# Altium PCB status board.PcbDoc
Units mil, origin at the board's own origin, x right, y up, seen from the top; angles counter-clockwise.
Board outline 2250 x 2500 mil, 2 copper layers (Top Layer, Bottom Layer); 43 components, 26 nets, 159 pads, 36 vias.
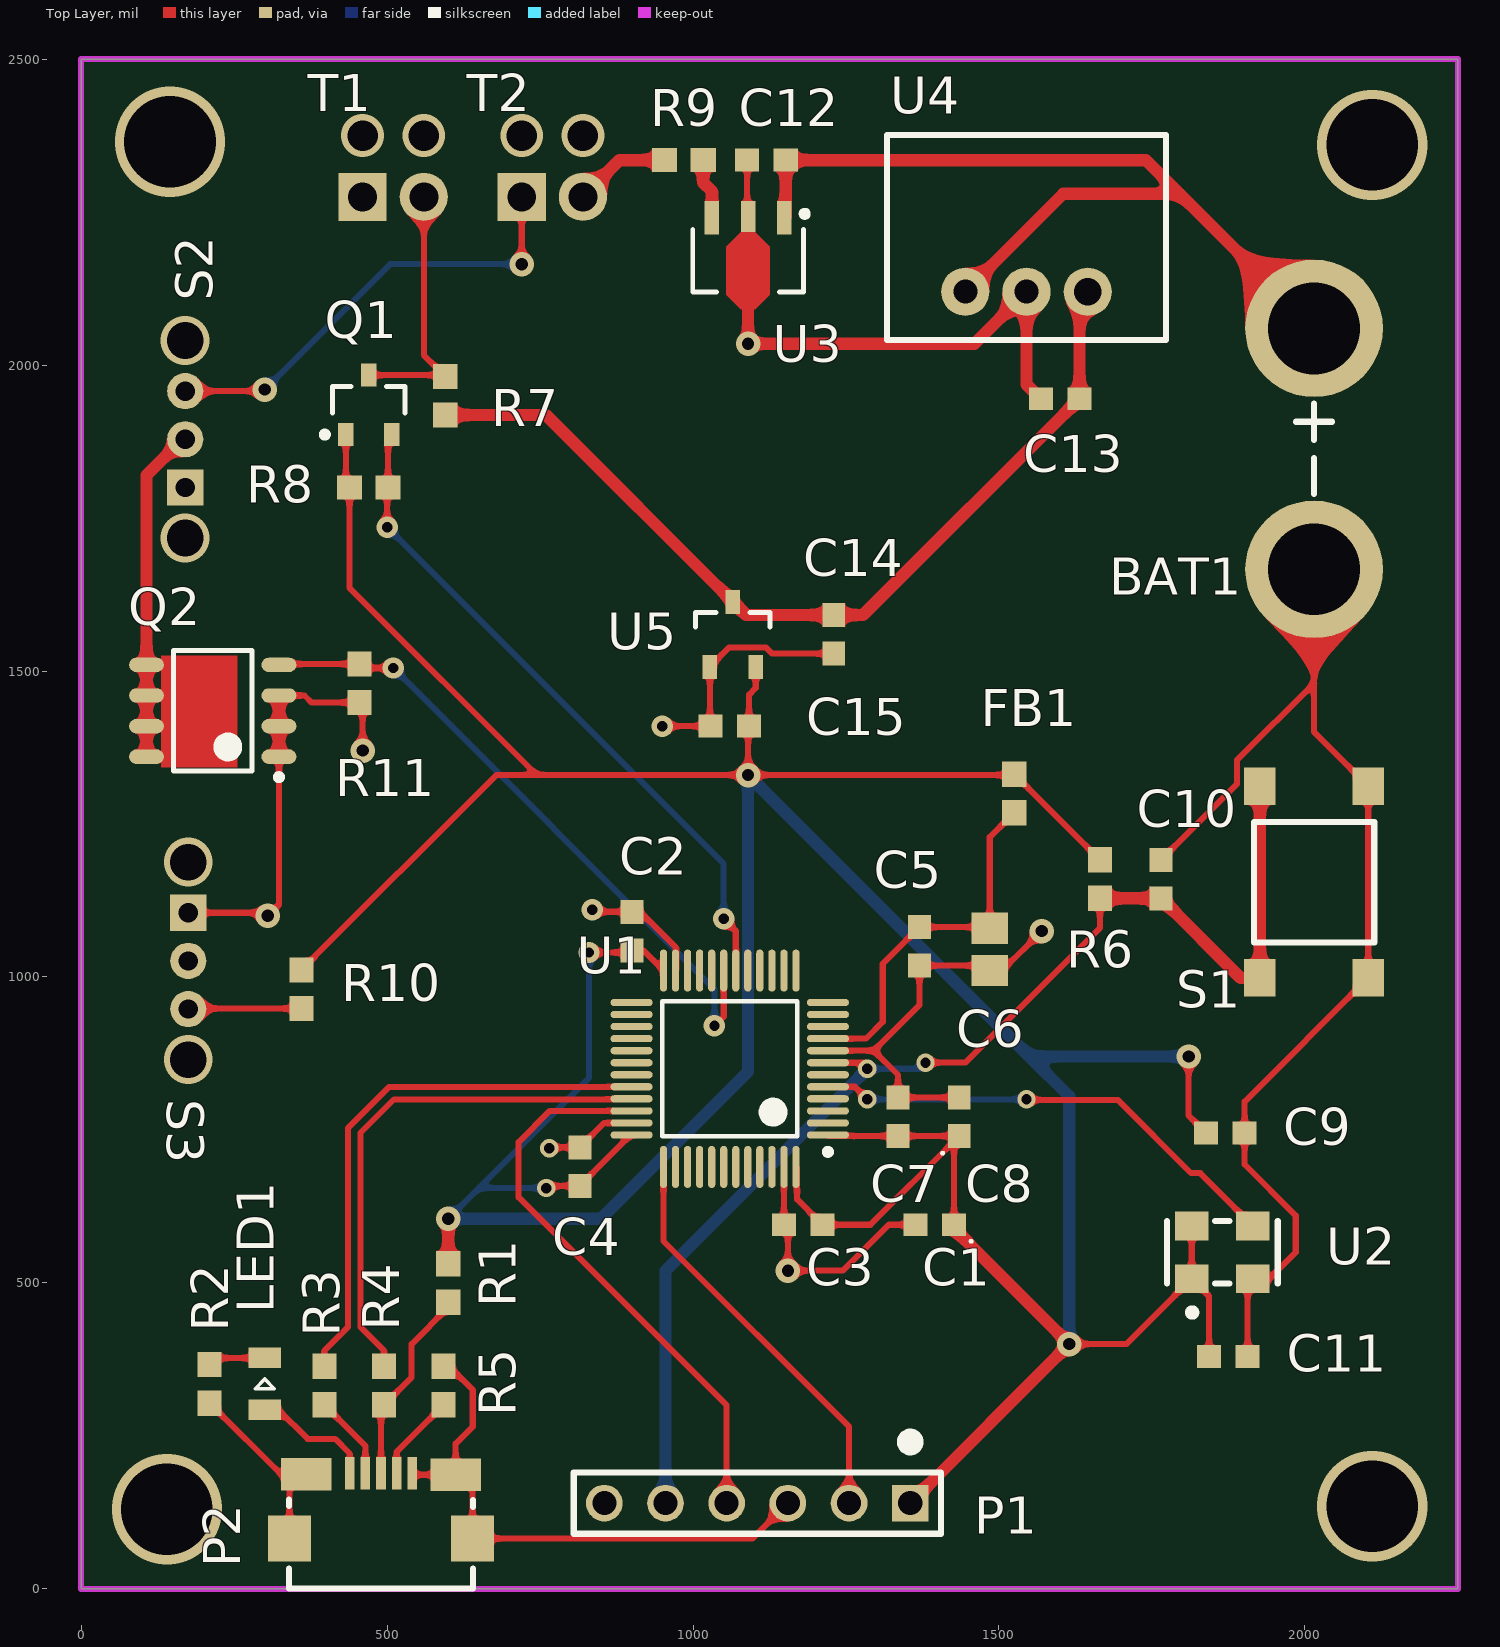
[diagram p0: Top Layer view]
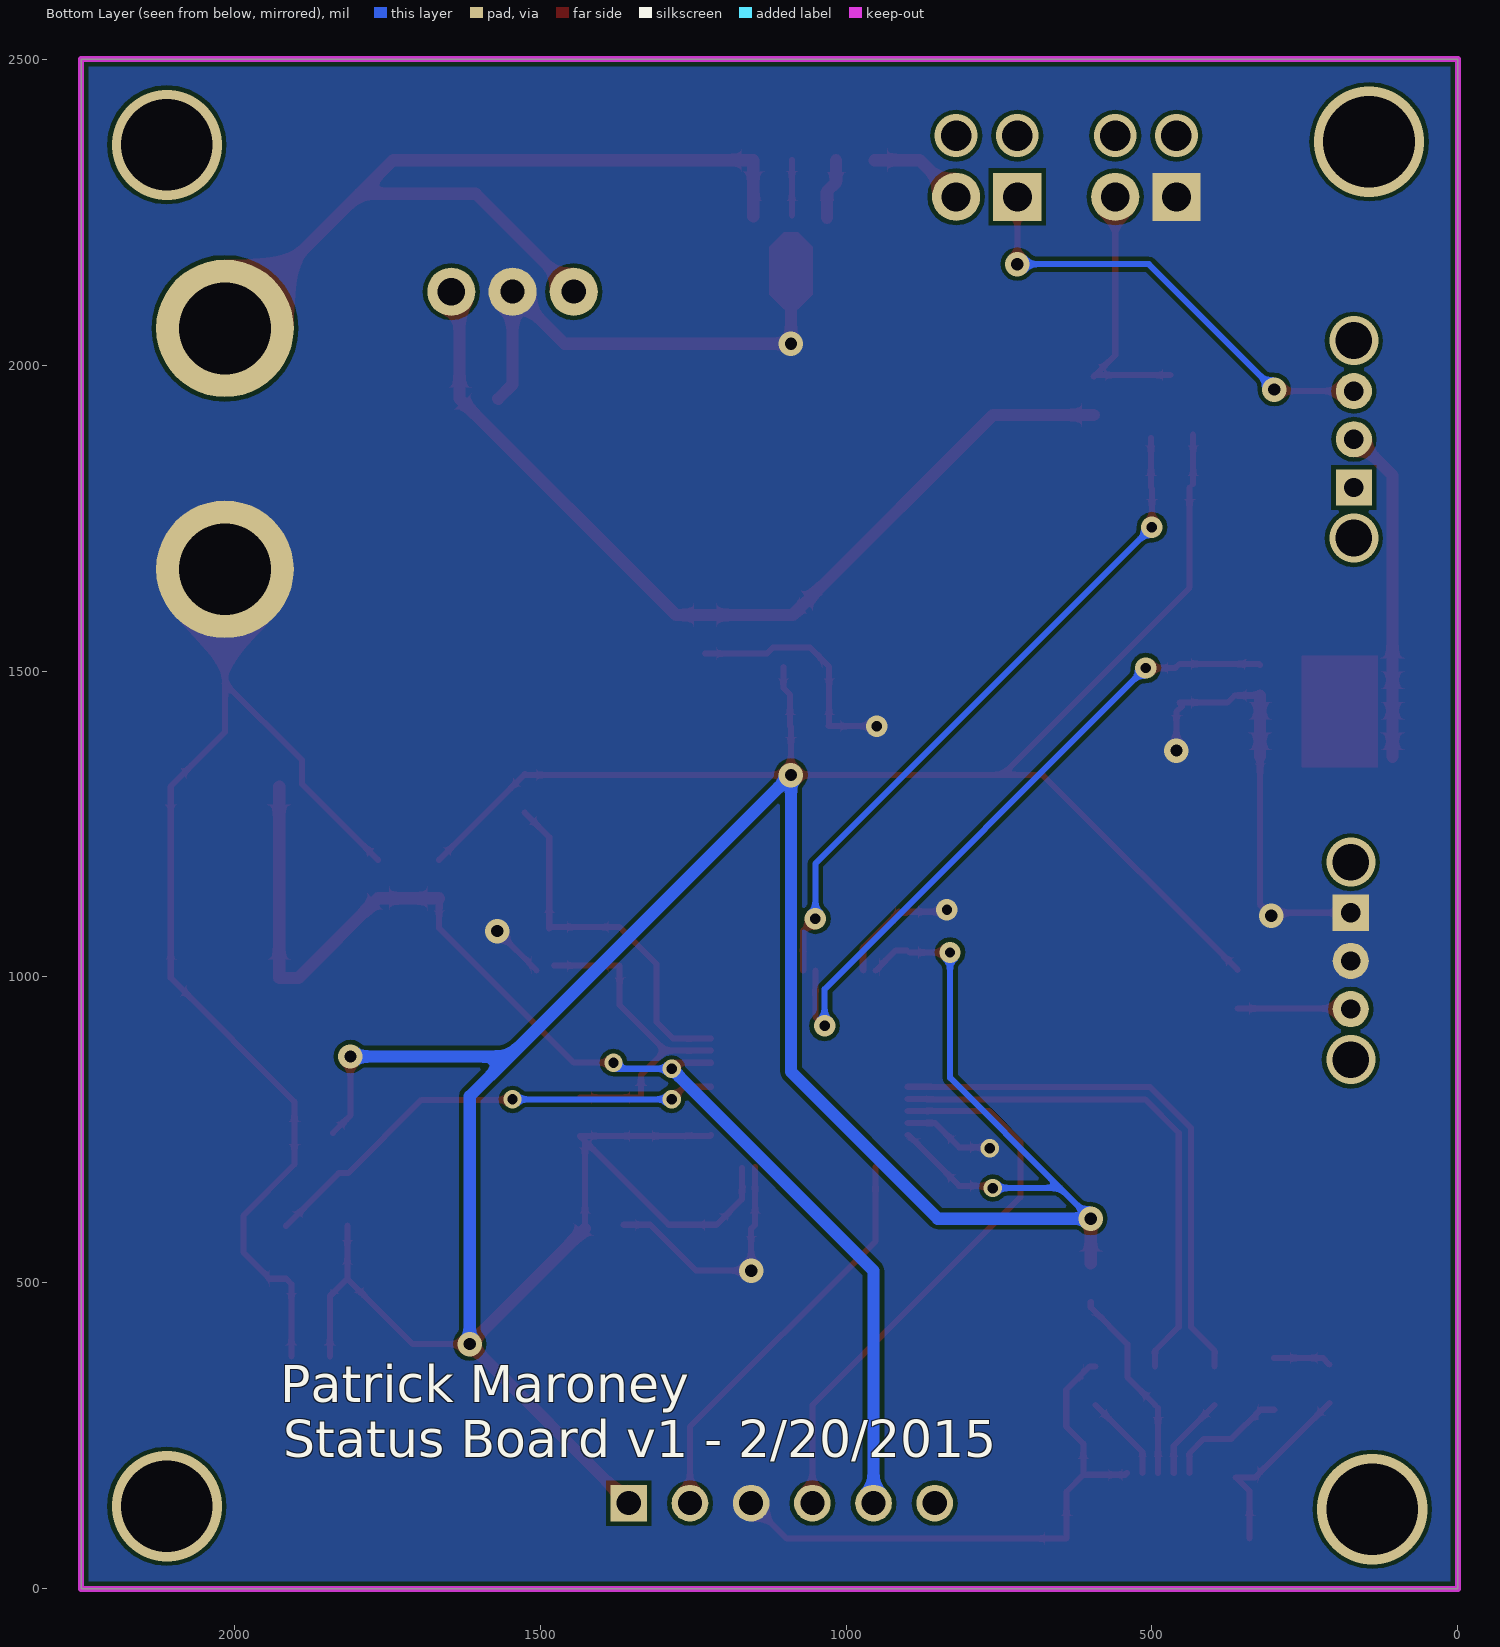
[diagram p1: Bottom Layer view, seen from below]

## Layer stack, top to bottom
Top Solder: solder mask 0.4, Solder Resist, Dk 3.5
Top Layer: signal copper 1.4
Dielectric1: dielectric 12.6, FR-4, Dk 4.8
Bottom Layer: signal copper 1.4
Bottom Solder: solder mask 0.4, Solder Resist, Dk 3.5

## Board outline
0,0 2250,0 2250,2500 0,2500

## Design rules (kind name [scope] priority, off if disabled: settings)
Clearance [All] p1: gap=7
DiffPairsRouting [All] p1: maxlimit=10 minlimit=7 mostfreqgap=10 toplayer_minwidth=7 toplayer_maxwidth=15 toplayer_prefwidth=10 bottomlayer_minwidth=7 bottomlayer_maxwidth=15 bottomlayer_prefwidth=10 maxuncoupledlength=500
PlaneConnect [All] p1: planeconnectstyle=Direct reliefexpansion=20 reliefentries=4 reliefconductorwidth=10 reliefairgap=10
PolygonConnect [All] p1: connectstyle=Direct reliefconductorwidth=10 reliefentries=4 polygonreliefangle="90 Angle" airgapwidth=10
RoutingVias [All] p1: holewidth=28 width=50 viastyle="Through Hole" minholewidth=28 minwidth=50 maxholewidth=28 maxwidth=50
SilkToSolderMaskClearance SilkscreenOverComponentPads [IsPad] p1: minsilkscreentomaskgap=10 clearancetoexposedcopper=TRUE
SolderMaskExpansion [All] p1: expansion=4
Width [All] p1: maxlimit=20 minlimit=10 preferedwidth=10 minimp=50.000000 maximp=50.000000 favimp=50.000000
27 further rules are at their usual default settings.

## Classes and differential pairs
component class Power: BAT1 C12 C13 C14 C15 Q1 Q2 R7 R8 R9 R10 R11 S2 S3 T1 T2 U3 U4 U5
component class CPU: C1 C2 C3 C4 C5 C6 C7 C8 C9 C10 C11 FB1 LED1 P1 P2 R1 R2 R3 R4 R5 R6 S1 U1 U2
differential pair USB: +USB_P -USB_N

## Components (designator, comment, footprint, x,y, rotation, side; value= is the part's Value field where it differs from the comment)
BAT1 "BATWIRE" BATWIRE12 2015,2060 r270 top
C1 "CapPol" CAPP0603 1395,595 r180 top
C2 "Cap" CAPC0603 900,1075 r90 top
C3 "Cap" CAPC0603 1180,595 r180 top
C4 "Cap" CAPC0603 815,690 r90 top
C5 "Cap" CAPC0603 1370,1050 r270 top
C6 "Cap" CAPC0805 1485,1045 r270 top
C7 "Cap" CAPC0603 1335,771.5 r90 top
C8 "CapPol" CAPP0603 1435,771.5 r90 top
C9 "Cap" CAPC0603 1870,745 r0 top
C10 "Cap" CAPC0603 1765,1160 r90 top
C11 "Cap" CAPC0603 1875,380 r0 top
C12 "Cap" CAPC0603 1120,2335 r180 top
C13 "Cap" CAPC0603 1600,1945 r180 top
C14 "Cap" CAPC0603 1230,1560 r270 top
C15 "Cap" CAPC0603 1060,1410 r180 top
FB1 "FBead" RES0603 1525,1300 r90 top
LED1 "LED" LED0805 300,335 r90 top
P1 "SWD" SWD_STM32 1355,140 r270 top
P2 "USB Micro" 10118192-0001LF 490,210 r0 top
Q1 "BSS138" BSS138 470,1935 r90 top
Q2 "TPCA8052-H(TE12LQM" TPCA8052-H(TE12LQM 215,1435 r180 top
R1 "Res" RES0603 600,500 r90 top
R2 "Res" RES0603 210,335 r270 top
R3 "Res" RES0603 397.5,332.13 r90 top
R4 "Res" RES0603 495,332.13 r90 top
R5 "Res" RES0603 592.5,332.13 r90 top
R6 "Res" RES0603 1665,1160 r90 top
R7 "Res" RES0603 595,1950 r90 top
R8 "Res" RES0603 470,1800 r0 top
R9 "Res" RES0603 985,2335 r180 top
R10 "Res" RES0603 360,980 r270 top
R11 "Res" RES0603 455,1480 r90 top
S1 "Button" PTS645xxxxSMTR92 2015,1155 r270 top
S2 "OS102011MS2QN1" OS102011MS2QN1 170,1800 r180 top
S3 "OS102011MS2QN1" OS102011MS2QN1 175,1105 r0 top
T1 "1725656" 1725656 460,2275 r90 top
T2 "1725656" 1725656 720,2275 r90 top
U1 "STM32F072CB" STM32F072CB 1060,850 r180 top
U2 "636L3C008M" 636L3C 1865,550 r0 top
U3 "RT9058-C0GX" RT9058-C0GX 1090,2180 r270 top
U4 "R-78C5.0-1.0" R-78C5.0-1.0 1445,2120 r0 top
U5 "MCP1703AT" MCP1703AT-xx02EDB 1065,1560 r90 top

## Footprints (in the part's own frame and the unit in brackets; to place one, negate y for a bottom-side part, rotate by r counter-clockwise, add the part's x,y. Pads: shape width x height; smd on the part's side, far side on the other; paste and mask are expansions set on the pad)
636L3C [mm]
  rect 1.4x1.2 smd: 1(-1.27,-1.1) 2(1.27,-1.1) 3(1.27,1.1) 4(-1.27,1.1)
  silkscreen extent -2.3,-2.65 2.3,1.3, body extent -2.5,-1.6 2.5,1.6, height 2
1725656 [mm] "CONN TERM BLOCK 2.54MM 2POS"
  rect 2x2 hole 1.2: 1(0,0)
  round 2 hole 1.2: 2(0,-2.54)
10118192-0001LF [mm] "USB Micro-B Recepticle"
  rect 0.4x1.35 smd: 1(-1.3,-0.533) 2(-0.65,-0.533) 3(0,-0.533) 4(0.65,-0.533) 5(1.3,-0.533)
  rect 1.8x1.9 smd: SHD(-3.8,-3.248) SHD(3.8,-3.248)
  rect 2.1x1.35 smd: SHD(-3.1,-0.584) SHD(3.1,-0.598)
  silkscreen extent -3.82,-5.32 3.83,-1.63, body extent -3.96,-5.98 3.96,-0.32, height 3.09
BATWIRE12 [mm] "Two 12AWG wires soldered directly to the board"
  round 5.715 hole 3.81: +(0,0) -(10,0)
  silkscreen extent 3.13,-0.75 6.87,0.75
BSS138 [mm] "MOSFET N-CH 50V 220MA SOT-23"
  rect 0.95x0.65 smd: D(1.235,0) G(-1.235,0.95) S(-1.235,-0.95)
  silkscreen extent -1.36,-1.5 0.76,1.95, body extent -0.76,-1.52 0.76,1.52, height 1.12
CAPC0603 [mm] "Chip Capacitor, 2-Leads, Body 1.60x0.80mm, IPC Medium Density"
  rect 1x0.95 smd: 1(-0.8,0) 2(0.8,0)
  body extent -0.88,-0.48 0.87,0.48, height 0.8
CAPC0805 [mm] "Chip Capacitor, 2-Leads, Body 2.01x1.25mm, IPC Medium Density"
  rect 1.3x1.5 smd: 1(-0.875,0) 2(0.875,0)
  body extent -1.1,-0.72 1.11,0.72, height 1.8
CAPP0603 [mm] "Chip Capacitor, 2-Leads, Body 1.60x0.80mm, IPC Medium Density"
  rect 1x0.95 smd: 1(-0.8,0) 2(0.8,0)
  silkscreen extent -1.56,0.64 -1.46,0.74, body extent -0.88,-0.48 0.87,0.48, height 0.8
LED0805 [mm] "Chip LED, 2-Leads, Body 2.00x1.25mm, IPC Medium Density"
  rect 0.85x1.35 smd: A(-1.075,0) C(1.075,0)
  silkscreen extent -0.2,-0.4 0.2,0.4, body extent -1,-0.63 1,0.63, height 0.75
MCP1703AT-xx02EDB [mm] "SOT23, 3-Leads, Body 2.90x2.55mm, Pitch 0.95mm, IPC Medium Density"
  rect 1x0.6 smd: 1(-1.35,0.95) 2(-1.35,-0.95) 3(1.35,0)
  silkscreen extent 0.3,-1.55 0.9,1.55, body extent -0.9,-1.55 0.9,1.55, height 1.45
OS102011MS2QN1 [mm] "SWITCH SLIDE SPDT 100MA 12V"
  rect 1.5x1.5 hole 0.8: 1(0,0)
  round 1.5 hole 0.8: 2(0,-2) 3(0,-4)
PTS645xxxxSMTR92 [mm] "PTS645 Series SMT 6 mm Tactile Switch"
  rect 1.555x1.3 smd: A(-3.975,2.25) A(3.975,2.25) B(-3.975,-2.25) B(3.975,-2.25)
  silkscreen extent -2.5,-2.5 2.5,2.5, body extent -3,-3 3,3, height 4.5
R-78C5.0-1.0 [mm] "CONV DC/DC 1A 5V OUT SIP VERT"
  round 2 hole 1: 1(0,0) 2(2.54,0)
  round 2 hole 1.15: 3(5.08,0)
  silkscreen extent -3.26,-2 8.34,6.5, body extent -3.2,-1.9 8.3,6.5, height 10.8
RES0603 [mm] "Chip Resistor, 2-Leads, Body 1.60x0.80mm, IPC Medium Density"
  rect 1.05x1 smd: 1(-0.8,0) 2(0.8,0)
  body extent -0.88,-0.48 0.87,0.47, height 0.8
RT9058-C0GX [mm]
  rect 1.4x0.6 smd: 1(-1.55,1.5) 3(-1.55,-1.5)
  rect 1.3x0.6 smd: 2(-1.6,0)
  Top Layer region: -0.95,0.3 -0.35,0.9 1.65,0.9 2.25,0.3 2.25,-0.3 1.65,-0.9 -0.35,-0.9 -0.95,-0.3
  silkscreen extent -1.83,-2.3 1.54,2.48, body extent -1.05,-2.3 1.54,2.3, height 1.6
STM32F072CB [mm] "TSQFP, 48-Leads, Body 7.00x7.00mm, Pitch 0.50mm, IPC Medium Density"
  oval 1.75x0.3 smd: 1(-4.075,2.75) 2(-4.075,2.25) 3(-4.075,1.75) 4(-4.075,1.25) 5(-4.075,0.75) 6(-4.075,0.25) 7(-4.075,-0.25) 8(-4.075,-0.75) 9(-4.075,-1.25) 10(-4.075,-1.75) 11(-4.075,-2.25) 12(-4.075,-2.75) 25(4.075,-2.75) 26(4.075,-2.25) 27(4.075,-1.75) 28(4.075,-1.25) 29(4.075,-0.75) 30(4.075,-0.25) 31(4.075,0.25) 32(4.075,0.75) 33(4.075,1.25) 34(4.075,1.75) 35(4.075,2.25) 36(4.075,2.75)
  oval 0.3x1.75 smd: 13(-2.75,-4.075) 14(-2.25,-4.075) 15(-1.75,-4.075) 16(-1.25,-4.075) 17(-0.75,-4.075) 18(-0.25,-4.075) 19(0.25,-4.075) 20(0.75,-4.075) 21(1.25,-4.075) 22(1.75,-4.075) 23(2.25,-4.075) 24(2.75,-4.075) 37(2.75,4.075) 38(2.25,4.075) 39(1.75,4.075) 40(1.25,4.075) 41(0.75,4.075) 42(0.25,4.075) 43(-0.25,4.075) 44(-0.75,4.075) 45(-1.25,4.075) 46(-1.75,4.075) 47(-2.25,4.075) 48(-2.75,4.075)
  silkscreen extent -4.2,-2.8 2.8,3.57, body extent -3.5,-3.5 3.5,3.5, height 1.6
SWD_STM32 [mil] "SWD connector matching the pinout on STM Discovery Boards"
  rect 60x60 hole 39.37: 1(0,0)
  round 60 hole 39.37: 2(0,-100) 3(0,-200) 4(0,-300) 5(0,-400) 6(0,-500)
  silkscreen extent -110,-550 50,50
TPCA8052-H(TE12LQM [mm] "MOSFET N-CH 40V 20A 8SOP"
  oval 1.45x0.6 smd: D(2.75,1.905) D(2.75,-0.635) D(2.75,0.635) D(2.75,-1.905) G(-2.75,-1.905) S(-2.75,1.905) S(-2.75,-0.635) S(-2.75,0.635)
  Top Layer region: -1.025,-2.3 2.15,-2.3 2.15,2.35 -1.025,2.35
  silkscreen extent -2.88,-2.5 1.62,2.88, body extent -2.5,-2.5 2.5,2.5, height 0.95

## Part data
BAT1: "Two large gauge leads soldered directly to the board."
FB1: "Ferrite Bead"
P1: library part SWD_STM32, "SWD connector matching the pinout on STM Discovery Boards"
P2: "USB Mini B Metal Shield SMT"
Q1: "MOSFET N-CH 50V 220MA SOT-23"
Q2: library part TPCA8052-H, "MOSFET N-CH 40V 20A 8SOP"
S1: "SPST Button"
S2 S3: "SWITCH SLIDE SPDT 100MA 12V"
T1 T2: "CONN TERM BLOCK 2.54MM 2POS"
U1: "MCU 32BIT 128KB FLASH 48LQFP"
U2: library part 636L3C, "HCMOS/TTL Clock Oscillator"
U3: "IC REG LDO 12V 0.1A"
U4: "CONV DC/DC 1A 5V OUT SIP VERT"
U5: "250 mA, 16V, Low Quiescent Current LDO Regulator"

## Via types
v1: diameter 40, hole 20, Top Layer to Bottom Layer, tented both sides, 11 vias
v2: diameter 35, hole 17, Top Layer to Bottom Layer, tented both sides, 7 vias
v3: diameter 30, hole 17, Top Layer to Bottom Layer, tented both sides, 6 vias
v4: diameter 180, hole 150, Top Layer to Bottom Layer, tented both sides, 4 vias
v5: diameter 80, hole 60, Top Layer to Bottom Layer, 4 vias
v6: diameter 70, hole 50, Top Layer to Bottom Layer, tented both sides, 4 vias

## Nets (pads, with @x,y where several pads share a name; then routed paths per layer and width w, separated by ;. In a path a pad name is that pad's centre, name@x,y a point inside that pad or via, vN(x,y) a via of type N, cw(c..) or ccw(c..) an arc to the next point about the centre after c; other vN are vias at no path point)
3.3V: C1.1 C2.1 C3.1 C4.1 C7.1 C8.1 C9.1 C11.1 C15.1 FB1.2 P1.1 Q1.G R1.2 R6.2 R8.1 R10.1 U1.1 U1.24 U1.36 U1.48 U2.1 U2.4 U5.2 | length 7836.7
  Top Layer w10: R10.1 678.5,1330 v1(1090,1330) ; R8.1@432.6,1805.91 Q1.G ; R8.1 438.5,1636.5 745,1330 ; v3@763.5,658.5 C4.1 898.23,741.73 U1.36 ; v2(830,1040) C2.1@896.5,1040 ; C2.1 918.66,1043.5 U1.24 ; C15.1@1090,1408.5 v1(1090,1330) ; C15.1 1091.5,1461.5 1102.4,1472.4 U5.2 ; U1.48@1170,687.83 1170,636.5 C3.1 1290,595 C8.1@1426.5,731.5 ; U1.1 1222.16,740 C7.1 C8.1 C8.1@1426.5,731.5 ; C1.1 C8.1@1426.5,731.5 ; v1(1615,400) 1708.31,400 U2.1 ; R6.2 FB1.2 1523.5,1330 v1(1090,1330) ; v1(1810,870) 1810,773.5 C9.1 ; U2.4 U2.1 ; C11.1 1843.5,478.19 U2.1
  Top Layer w20: R1.2 v1(600,605) ; P1.1 v1(1615,400) C1.1@1426.5,588.5
  Bottom Layer w10: v1(600,605) 650,655 ; v3(760,655) 650,655 ; v2(830,1040) 830,835 650,655
  Bottom Layer w20: v1(600,605) 850,605 1090,845 v1(1090,1330) 1550,870 ; v1(1615,400) 1615,805 1550,870 ; v1(1810,870) 1550,870
"3V3 LED SIGNAL": Q1.S R8.2 U1.18 | length 1104.6
  Top Layer w10: v2(500,1735) R8.2@500,1798.51 ; R8.2 Q1.S@501.5,1880.47 ; v2(1050,1095) 1069.84,1075.16 U1.18
  Bottom Layer w10: v2(500,1735) 1050,1185 v2(1050,1095)
5V: C13.1 C14.1 R7.1 U4.3 U5.3 | length 1499
  Top Layer w20: R7.1 759.64,1918.5 U5.3 1086.65,1591.5 C14.1 1277.99,1591.5 C13.1 1631.5,2106.5 U4.3
"5V LED SIGNAL": Q1.D R7.2 T1.2 | length 430.9
  Top Layer w10: Q1.D R7.2@592.87,1983.62 ; T1.2 560,2016.5 R7.2@592.87,1983.62 ; R7.2 R7.2@592.87,1983.62
12V: R9.1 U3.3 | length 100
  Top Layer w20: R9.1 1016.5,2298.5 1030.94,2284.06 U3.3
32MHZ: U1.5 U2.3 | length 787.4
  Top Layer w10: U1.5 1264.53,820.47 v3(1285,800) ; v3@1545.93,799.07 1694.07,799.07 1813.85,679.3 1829.01,679.3 U2.3
  Bottom Layer w10: v3(1285,800) v3(1545,800)
"FORCE LEDS": U1.20
FORCE_LEDS: R10.2 S3.3 | length 185.4
  Top Layer w10: S3.3 175.99,948.5 R10.2
GND: BAT1.- C1.2 C2.2 C3.2 C4.2 C5.2 C6.2 C7.2 C8.2 C9.2 C10.2 C11.2 C12.2 C13.2 C14.2 C15.2 P1.3 P2.5 P2.SHD Q2.S R2.2 R5.2 R11.1 S1.A S3.1 S3.2 T1.1 U1.8 U1.23 U1.35 U1.47 U2.2 U3.2 U4.2 U5.1 | length 6547.2
  Top Layer w10: S3.1 v1@300,1105 ; R2.2 331.48,182.02 362.98,182.02 340.39,159.44 P2.SHD@340.39,82.11 ; v1(305,1100) 323.27,1118.27 Q2.S@323.27,1360 ; Q2.S@323.27,1460 365,1460 376.5,1448.5 R11.1 450,1443.5 460,1433.5 v1(460,1370) ; P2.5 543.74,186.44 P2.SHD@612.05,186.44 ; R5.2 601.38,363.62 640,325 640,265 612.05,237.05 P2.SHD@612.05,186.44 ; v3(765,720) 766.5,721.5 C4.2 854.92,761.42 U1.35 ; v2@838.5,1106.5 C2.2 ; C2.2@901.5,1105 C2.2@915,1105 ; C2.2@913.5,1106.5 C2.2@915,1105 ; v2(950,1410) C15.2 ; U1.23 971.42,1048.58 C2.2@915,1105 ; U1.23@973.2,1012.21 973.2,1046.39 ; C15.2@1027.6,1410.91 U5.1 1059.28,1538.53 1119.18,1538.53 1129.21,1528.5 C14.2 ; U3.2@1088.5,2244.49 C12.2 ; U1.47 1148.5,689.49 C3.2 1155,588.5 v1(1155,520) 1245,520 1320,595 C1.2 ; P1.3 1097.11,82.11 639.61,82.11 639.61,158.88 P2.SHD@612.05,186.44 ; U1.8 1295.47,879.53 ; C8.2 C7.2 1335,840 1295.47,879.53 ; C6.2@1477.05,1018.5 C5.2 1370,954.06 1295.47,879.53 ; C6.2@1505.55,1010.55 v1(1570,1075) ; C10.2 1888.83,1315.32 1888.83,1354.11 2015,1480.28 ; C11.2 1906.5,498.19 U2.2 1941.69,506.69 1985,550 1985,610 1901.5,693.5 C9.2 1901.5,796.42 2103.58,998.5 2103.58,1311.5 2015,1400.08 2015,1480.28 ; BAT1.- 2015,1480.28
  Top Layer w20: Q2.S@323.27,1360 323.27,1410 Q2.S@323.27,1460 ; 1090,2145 v1(1090,2035) 1460,2035 U4.2 1545,1968.5 C13.2
  other v2: 835,1110
MCU_PIEZO: Q2.G R11.2 U1.19 | length 1089.2
  Top Layer w10: Q2.G 324.76,1511.5 R11.2 461.5,1505 v2(510,1505) ; v2(1035,920) 1050.16,935.16 U1.19
  Bottom Layer w10: v2(510,1505) 1035,980 v2(1035,920)
NetLED1_A: LED1.A P2.1 | length 200.6
  Top Layer w10: LED1.A 322.32,292.68 370,245 415,245 438.82,221.18 P2.1
NetLED1_C: LED1.C R2.1 | length 94.5
  Top Layer w10: R2.1 220.83,377.32 LED1.C
NetP2_2: P2.2 R3.1 | length 139.3
  Top Layer w10: R3.1 464.41,233.72 P2.2
NetP2_3: P2.3 R1.1 R4.1 | length 318
  Top Layer w10: P2.3 R4.1@490,295.63 ; R4.1 540,345.63 540,400 600,460 R1.1
NetP2_4: P2.4 R5.1 | length 143.5
  Top Layer w10: P2.4 515.59,223.72 R5.1
NetQ2_D: Q2.D S2.2 | length 547.5
  Top Layer w20: Q2.D@106.73,1360 106.73,1410 106.73,1460 106.73,1510 106.73,1819.83 165.64,1878.74 S2.2
NetS2_3: S2.3 T2.1 | length 742.4
  Top Layer w10: S2.3 v1@297.48,1957.48 ; v1(720,2165) T2.1
  Bottom Layer w10: v1(300,1960) 505,2165 v1(720,2165)
NRST: C10.1 P1.5 R6.1 S1.B U1.7 | length 2053.2
  Top Layer w10: U1.7 1275.16,859.84 v3(1285,850) ; v3(1380,860) 1445,860 1665,1080 R6.1
  Top Layer w20: R6.1 C10.1 1895,998.5 1926.42,998.5 S1.B@1926.42,1311.5
  Bottom Layer w10: v3(1285,850) v3@1370,850
  Bottom Layer w20: P1.5 955,520 v3(1285,850)
PIEZO: R9.2 T2.2 | length 158.4
  Top Layer w20: T2.2 880,2335 R9.2
RAIL+: BAT1.+ C12.1 U3.1 U4.1 | length 1485.2
  Top Layer w20: U3.1@1151.5,2243.47 C12.1 1740,2335 1795,2280 ; U4.1 1605,2280 1795,2280 ; BAT1.+ 1795,2280
SWCLK: P1.2 U1.37 | length 675.2
  Top Layer w10: U1.37 951.73,568.27 1255,265 P1.2
SWDIO: P1.4 U1.34 | length 936.6
  Top Layer w10: U1.34 766.1,781.1 715,730 715,640 1055,300 P1.4
SWO: P1.6
USB_N: R3.2 U1.32 | length 896.9
  Top Layer w10: R3.2 397.5,389.29 436.25,428.04 436.25,753.28 502.97,820 859.65,820 860.12,820.47 U1.32
USB_P: R4.2 U1.33 | length 863.7
  Top Layer w10: R4.2 495,389.29 456.25,428.04 456.25,745 511.25,800 867.93,800 868.4,800.47 U1.33@899.57,800.47
VDDA: C5.1 C6.1 FB1.1 U1.9 | length 599.3
  Top Layer w10: U1.9 1282.68,899.21 1310,926.53 1310,1021.5 C5.1 C6.1@1482.95,1081.5 ; C6.1 1485,1228.5 FB1.1
pads on no net: S2.1 U1.2 U1.3 U1.4 U1.6 U1.10 U1.11 U1.12 U1.13 U1.14 U1.15 U1.16 U1.17 U1.21 U1.22 U1.25 U1.26 U1.27 U1.28 U1.29 U1.30 U1.31 U1.38 U1.39 U1.40 U1.41 U1.42 U1.43 U1.44 U1.45 U1.46
copper on no net:
  other v4: 140,130 2110,135 2110,2360 145,2365
  other v5: 175,864.84 175,1187.68 170,1717.32 170,2040.16
  other v6: 460,2375 560,2375 720,2375 820,2375

## Polygon pours and split planes (outlines as drawn)
GND on Bottom Layer "Bottom Layer-No Net" (solid, pour order 2): 0,0 0,2500 2250,2500 2250,0 0,0

## Keep-outs
Keep-Out Layer:
  the board outline again, w10

## Silkscreen, mask and mechanical layers (free items; w line width, h text height)
Bottom Overlay:
  text "Patrick Maroney" at 1925,305 h60
  text "Status Board v1 - 2/20/2015" at 1920,215 h60